# Altium PCB HAB_V01R01.PcbDoc
Units mil, origin at the board's own origin, x right, y up, seen from the top; angles counter-clockwise.
Board outline 4291.34 x 2322.83 mil, 4 copper layers ([L1] Top Layer, [L2] GND, [L3] PWR, [L4] Bottom Layer), stack 53.912 mil thick; 7 components, 1 nets, 98 pads, 0 vias.
Unrouted connection lines stored in the file: 7.
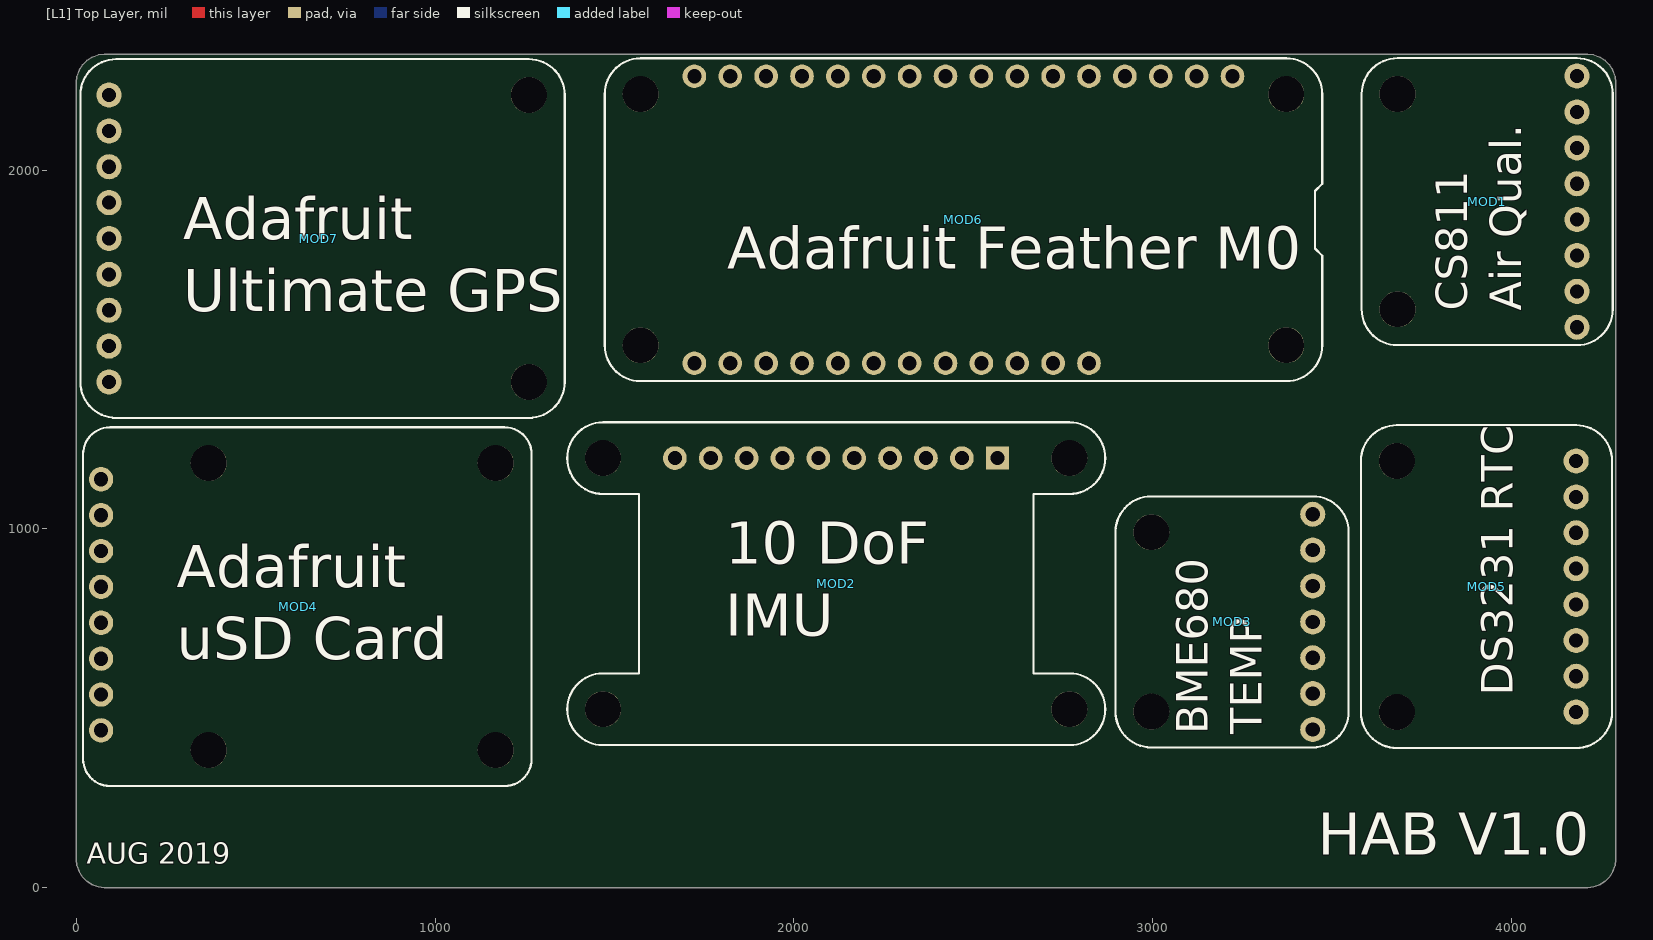
[diagram p0: [L1] Top Layer view]
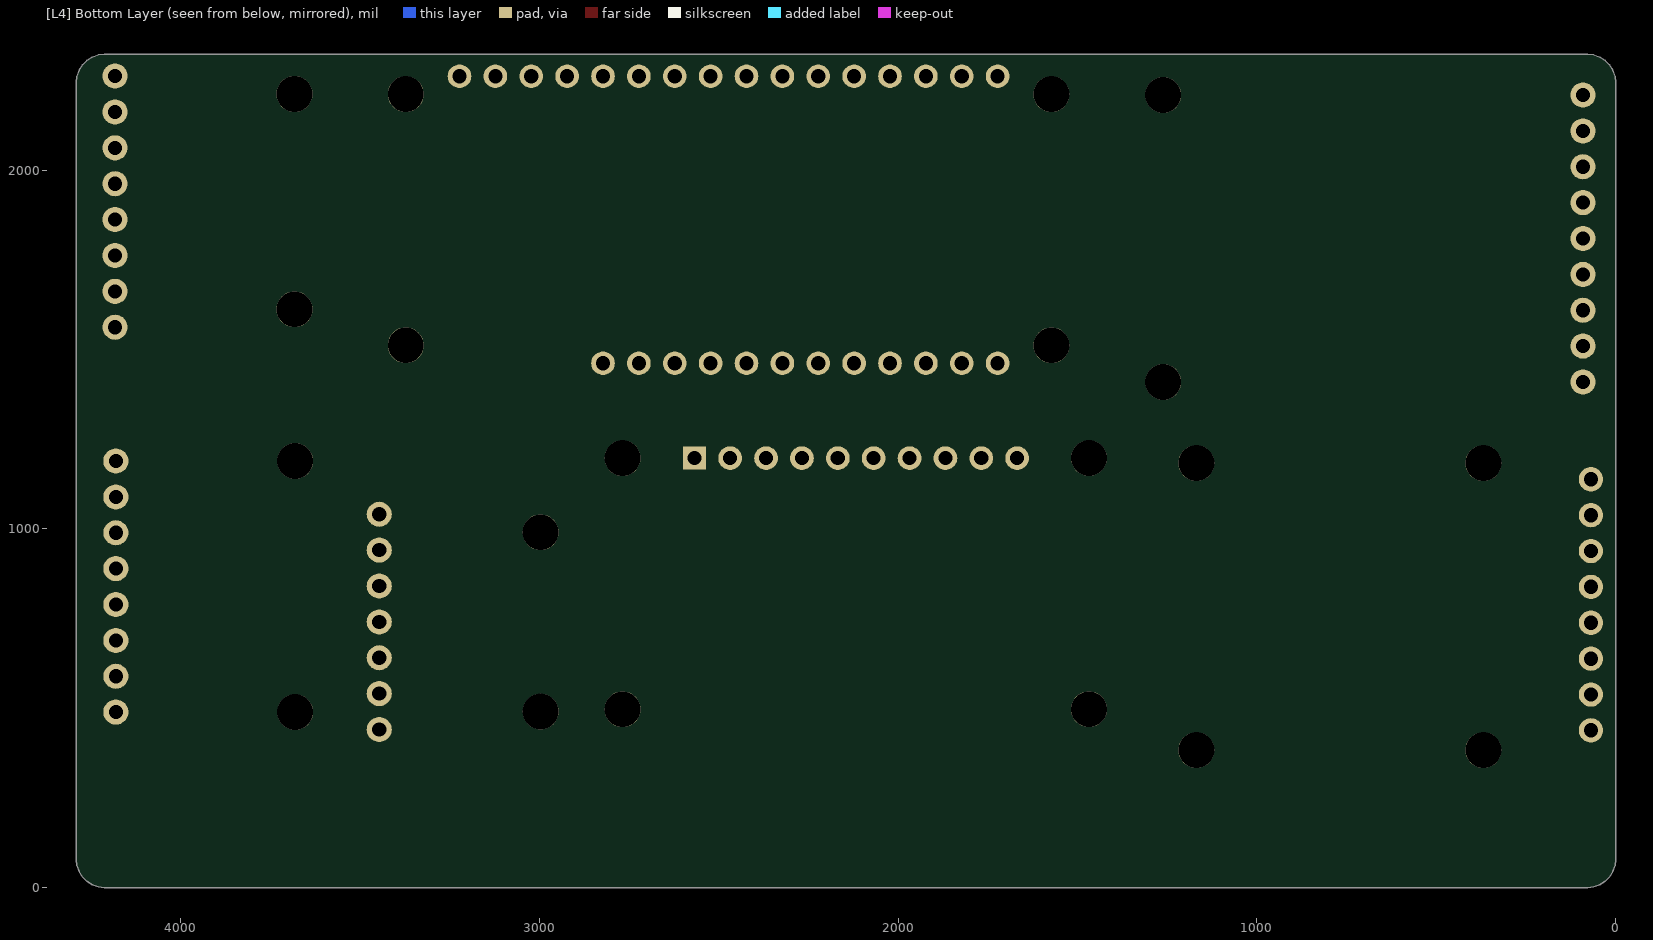
[diagram p1: [L4] Bottom Layer view, seen from below]

## Layer stack, top to bottom
Top Solder: solder mask 1, SM-001, Dk 4
[L1] Top Layer: signal copper 1.3779
Dielectric 1: prepreg 5.1, PP-017, Dk 4.3
Dielectric 2: prepreg 5.1, PP-017, Dk 4.3
[L2] GND: signal copper 1.3779
Dielectric 3: core 28, Core-039, Dk 4.8
[L3] PWR: signal copper 1.3779
Dielectric 4: prepreg 5.1, PP-017, Dk 4.3
Dielectric 5: prepreg 5.1, PP-017, Dk 4.3
[L4] Bottom Layer: signal copper 1.3779
Bottom Solder: solder mask 1, SM-001, Dk 4

## Board outline
0,78.74 0,2244.09 1.97,2261.62 7.8,2278.26 17.18,2293.19 29.65,2305.66 44.58,2315.04 61.22,2320.86 78.74,2322.83 4212.6,2322.83 4230.12,2320.86 4246.76,2315.04 4261.69,2305.66 4274.16,2293.19 4283.54,2278.26 4289.36,2261.62 4291.34,2244.09 4291.34,78.74 4289.36,61.22 4283.54,44.58 4274.16,29.65 4261.69,17.18 4246.76,7.8 4230.12,1.97 4212.6,0 78.74,0 61.22,1.97 44.58,7.8 29.65,17.18 17.18,29.65 7.8,44.58 1.97,61.22

## Design rules (kind name [scope] priority, off if disabled: settings)
BoardOutlineClearance [Not OnSilkscreen] p1: gap=10 ignorepadtopadclearanceinfootprint=FALSE
Clearance [All] p1: gap=6 ignorepadtopadclearanceinfootprint=FALSE except(0: THPad-Hole Via-Hole Fill-Hole Poly-Hole Region-Hole Text-Hole; 1: Arc-Arc Arc-SMDPad Arc-THPad Arc-Via Arc-Fill Arc-Text; 10: Track-Hole SMDPad-Hole)
DiffPairsRouting DIFF90 [InDifferentialPairClass('DIFF90')] p1: maxlimit=6 minlimit=6 mostfreqgap=6 toplayer_minwidth=6 toplayer_maxwidth=6 toplayer_prefwidth=6 midlayer1_minwidth=6 midlayer1_maxwidth=6 midlayer1_prefwidth=6 midlayer2_minwidth=6 midlayer2_maxwidth=6 midlayer2_prefwidth=6 bottomlayer_minwidth=6 bottomlayer_maxwidth=6 bottomlayer_prefwidth=6 maxuncoupledlength=250
DiffPairsRouting DIFF100 [InDifferentialPairClass('DIFF100')] p2: maxlimit=7 minlimit=6 mostfreqgap=7 toplayer_maxgap=6 toplayer_prefgap=6 toplayer_minwidth=6 toplayer_maxwidth=6 toplayer_prefwidth=6 midlayer1_mingap=7 midlayer1_minwidth=4 midlayer1_maxwidth=4 midlayer1_prefwidth=4 midlayer2_mingap=7 midlayer2_minwidth=4 midlayer2_maxwidth=4 midlayer2_prefwidth=4 bottomlayer_maxgap=6 bottomlayer_prefgap=6 bottomlayer_minwidth=6 bottomlayer_maxwidth=6 bottomlayer_prefwidth=6 maxuncoupledlength=250
DiffPairsRouting [All] p3: maxlimit=10 minlimit=10 mostfreqgap=10 toplayer_minwidth=15 toplayer_maxwidth=15 toplayer_prefwidth=15 midlayer1_minwidth=15 midlayer1_maxwidth=15 midlayer1_prefwidth=15 midlayer2_minwidth=15 midlayer2_maxwidth=15 midlayer2_prefwidth=15 bottomlayer_minwidth=15 bottomlayer_maxwidth=15 bottomlayer_prefwidth=15 maxuncoupledlength=500
HoleSize [All] p1: absolutevalues=TRUE maxlimit=1000 minlimit=1 maxpercent=80.000 minpercent=20.000
HoleToHoleClearance [All] p1: gap=6 allowstackedmicrovias=TRUE
MatchedLengths MatchedLengths_CSI_2 [InNetClass('CSI_2')] p1: tolerance=5 checknetsindiffpair=FALSE checkdiffpairvsdiffpair=TRUE checkxsignals=TRUE checkothers=TRUE
MatchedLengths MatchedLengths_CSI_1 [InNetClass('CSI_1')] p2: tolerance=5 checknetsindiffpair=FALSE checkdiffpairvsdiffpair=TRUE checkxsignals=TRUE checkothers=TRUE
MaxMinImpedance "USB3 IMPEDANCE" [InNetClass('USB3')] p1: minimum=81.00 maximum=99.00
MaxMinImpedance "USB2 IMPEDANCE" [InNetClass('USB2')] p2: minimum=81.00 maximum=99.00
MaxMinImpedance "ETH IMPEDANCE" [InNetClass('ETH')] p3: minimum=90.00 maximum=110.0
MaxMinImpedance "SATA IMPEDANCE" [InNetClass('mSATA')] p4: minimum=90.00 maximum=110.0
MinimumSolderMaskSliver [All] p1: minsoldermaskwidth=4
NetAntennae [All] p1: netantennaetolerance=1000
PlaneClearance [All] p1: clearance=10
PlaneConnect [All] p1: planeconnectstyle=Direct reliefexpansion=20 reliefentries=4 reliefconductorwidth=10 reliefairgap=10
PolygonConnect [All] p1: connectstyle=Relief reliefconductorwidth=10 reliefentries=4 polygonreliefangle="90 Angle" airgapwidth=10
RoutingVias DIFF_VIAS [InDifferentialPairClass('All Differential Pairs')] p1: holewidth=7.87 width=11.81 viastyle="Through Hole" minholewidth=7.87 minwidth=11.81 maxholewidth=7.87 maxwidth=11.81
RoutingVias [All] p2: holewidth=28 width=50 viastyle="Through Hole" minholewidth=28 minwidth=50 maxholewidth=28 maxwidth=50
SilkToSilkClearance [All] p1: silktosilkclearance=4
SilkToSolderMaskClearance [IsPad] p1: minsilkscreentomaskgap=1 clearancetoexposedcopper=TRUE
SolderMaskExpansion [All] p1: expansion=4
Width [All] p1: maxlimit=100 minlimit=4 preferedwidth=6
21 further rules are at their usual default settings.

## Components (designator, comment, footprint, x,y, rotation, side; value= is the part's Value field where it differs from the comment)
MOD1 "ADAFRUIT_CCS811_AIR-QUALITY" ADAFRUIT_CCS811_AIR-QUALITY 4183.07,1562.01 r90 top
MOD2 "ADAFRUIT_10DOF_IMU" ADAFRUIT_10DOF_IMU 2568.5,1197.05 r180 top
MOD3 "ADAFRUIT_BME680_TEMP" ADAFRUIT_BME680_TEMP 3446.85,440.55 r90 top
MOD4 "ADAFRUIT_MICROSD" ADAFRUIT_MicroSD 69.09,1138.07 r180 top
MOD5 "ADAFRUIT_DS3231_RTC" ADAFRUIT_DS3231_RTC 4181.1,488.98 r90 top
MOD6 "ADAFRUIT_FEATHER_M0" ADAFRUIT_FEATHER_M0 2823.03,1461.61 r180 top
MOD7 "ADAFRUIT_ULTIMATE_GPS" ADAFRUIT_ULTIMATE_GPS 91.54,2209.25 r270 top

## Footprints (in the part's own frame and the unit in brackets; to place one, negate y for a bottom-side part, rotate by r counter-clockwise, add the part's x,y. Pads: shape width x height; smd on the part's side, far side on the other; paste and mask are expansions set on the pad)
ADAFRUIT_10DOF_IMU [mil] "Adafruit 10-DOF IMU Breakout - L3GD20H + LSM303 + BMP180"
  rect 63.9x63.9 hole 39.37: 1(0,0)
  round 66 hole 39.37: 2(100,0) 3(200,0) 4(300,0) 5(400,0) 6(500,0) 7(600,0) 8(700,0) 9(800,0) 10(900,0)
  round 100 hole 100 unplated: MH(-200,700) MH(-200,0) MH(1100,0) MH(1100,700)
  silkscreen extent -300,-100 1200,800
ADAFRUIT_BME680_TEMP [mil] "Adafruit BME680 - Temperature, Humidity, Pressure and Gas Sensor"
  round 70 hole 39.37: 1(0,0) 2(100,0) 3(200,0) 4(300,0) 5(400,0) 6(500,0) 7(600,0)
  round 100 hole 100 unplated: MH(50,450) MH(550,450)
  silkscreen extent -50,-100 650,550
ADAFRUIT_CCS811_AIR-QUALITY [mil] "Adafruit CCS811 Air Quality Sensor Breakout - VOC and eCO2"
  round 70 hole 39.37: 1(0,0) 2(100,0) 3(200,0) 4(300,0) 5(400,0) 6(500,0) 7(600,0) 8(700,0)
  round 100 hole 100 unplated: MH(50,500) MH(650,500)
  silkscreen extent -50,-100 750,600
ADAFRUIT_DS3231_RTC [mil] "Adafruit DS3231 Precision RTC Breakout"
  round 70 hole 39.37: 1(0,0) 2(100,0) 3(200,0) 4(300,0) 5(400,0) 6(500,0) 7(600,0) 8(700,0)
  round 100 hole 100 unplated: MH(0,500) MH(700,500)
  silkscreen extent -100,-100 800,600
ADAFRUIT_FEATHER_M0 [mil] "Adafruit Feather M0 Basic Proto - ATSAMD21 Cortex M0"
  round 66 hole 39.37: 1(0,0) 2(100,0) 3(200,0) 4(300,0) 5(400,0) 6(500,0) 7(600,0) 8(700,0) 9(800,0) 10(900,0) 11(1000,0) 12(1100,0) 13(1100,-800) 14(1000,-800) 15(900,-800) 16(800,-800) 17(700,-800) 18(600,-800) 19(500,-800) 20(400,-800) 21(300,-800) 22(200,-800) 23(100,-800) 24(0,-800) 25(-100,-800) 26(-200,-800) 27(-300,-800) 28(-400,-800)
  round 100 hole 100 unplated: MH(-550,-50) MH(-550,-750) MH(1250,-750) MH(1250,-50)
  silkscreen extent -650,-850 1350,50
ADAFRUIT_MicroSD [mil] "Adafruit MicroSD card breakout board"
  round 67.78 hole 40: 1(0,0) 2(0,100) 3(0,200) 4(0,300) 5(0,400) 6(0,500) 7(0,600) 8(0,700)
  round 100 hole 100 unplated: MH(-1100,-45) MH(-1100,755) MH(-300,755) MH(-300,-45)
  silkscreen extent -1200,-145 50,855
ADAFRUIT_ULTIMATE_GPS [mil] "Adafruit Ultimate GPS Breakout"
  round 70 hole 39.37: 1(0,0) 2(100,0) 3(200,0) 4(300,0) 5(400,0) 6(500,0) 7(600,0) 8(700,0) 9(800,0)
  round 100 hole 100 unplated: MH(0,1170) MH(800,1170)
  silkscreen extent -100,-80 900,1270

## Nets (pads, with @x,y where several pads share a name; then routed paths per layer and width w, separated by ;. In a path a pad name is that pad's centre, name@x,y a point inside that pad or via, vN(x,y) a via of type N, cw(c..) or ccw(c..) an arc to the next point about the centre after c; other vN are vias at no path point)
GND: MOD1.3 MOD2.3 MOD3.3 MOD4.3 MOD5.2 MOD6.13 MOD6.25 MOD7.7
pads on no net: MOD1.1 MOD1.2 MOD1.4 MOD1.5 MOD1.6 MOD1.7 MOD1.8 MOD1.MH MOD2.1 MOD2.2 MOD2.4 MOD2.5 MOD2.6 MOD2.7 MOD2.8 MOD2.9 MOD2.10 MOD2.MH MOD3.1 MOD3.2 MOD3.4 MOD3.5 MOD3.6 MOD3.7 MOD3.MH MOD4.1 MOD4.2 MOD4.4 MOD4.5 MOD4.6 MOD4.7 MOD4.8 MOD4.MH MOD5.1 MOD5.3 MOD5.4 MOD5.5 MOD5.6 MOD5.7 MOD5.8 MOD5.MH MOD6.1 MOD6.2 MOD6.3 MOD6.4 MOD6.5 MOD6.6 MOD6.7 MOD6.8 MOD6.9 MOD6.10 MOD6.11 MOD6.12 MOD6.14 MOD6.15 MOD6.16 MOD6.17 MOD6.18 MOD6.19 MOD6.20 MOD6.21 MOD6.22 MOD6.23 MOD6.24 MOD6.26 MOD6.27 MOD6.28 MOD6.MH MOD7.1 MOD7.2 MOD7.3 MOD7.4 MOD7.5 MOD7.6 MOD7.8 MOD7.9 MOD7.MH

## Silkscreen, mask and mechanical layers (free items; w line width, h text height)
Top Overlay:
  text "Adafruit Feather M0" at 1814.96,1685.83 h200
  text "CS811 / Air Qual." at 4057.09,1607.28 h150 r90
  text "Adafruit / Ultimate GPS" at 298.23,1567.91 h200
  text "10 DoF / IMU" at 1809.06,663.39 h200
  text "Adafruit / uSD Card" at 279.53,597.44 h200
  text "DS3231 RTC" at 4033.46,534.45 h150 r90
  text "BME680 / TEMP" at 3333.66,427.17 h150 r90
  text "HAB V1.0" at 3460.63,52.17 h200
  text "AUG 2019" at 29.53,47.24 h100